# Altium PCB pcb mia.PcbDoc
Units mm, origin at the board's own origin, x right, y up, seen from the top; angles counter-clockwise.
Board outline 96.01 x 69.34 mm, 2 copper layers (Top Layer, Bottom Layer); 16 components, 12 nets, 36 pads, 0 vias.
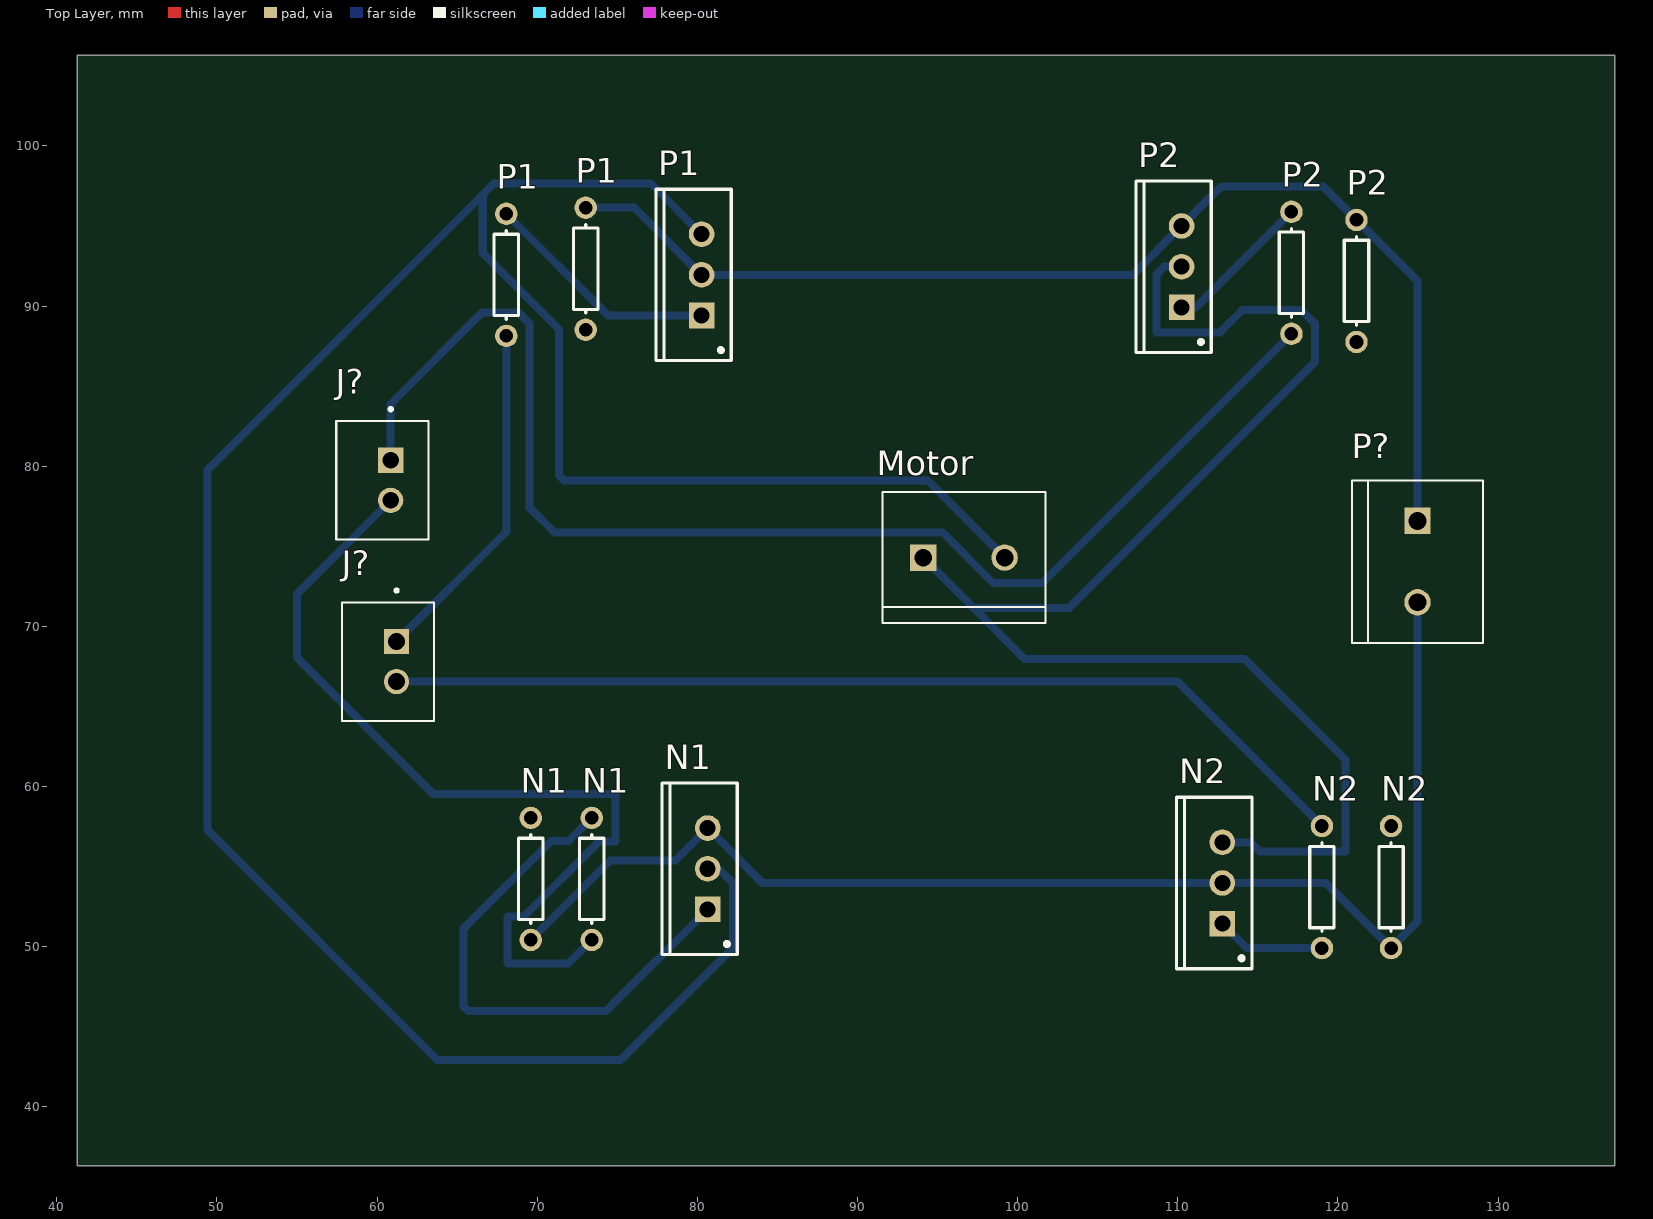
[diagram p0: Top Layer view]
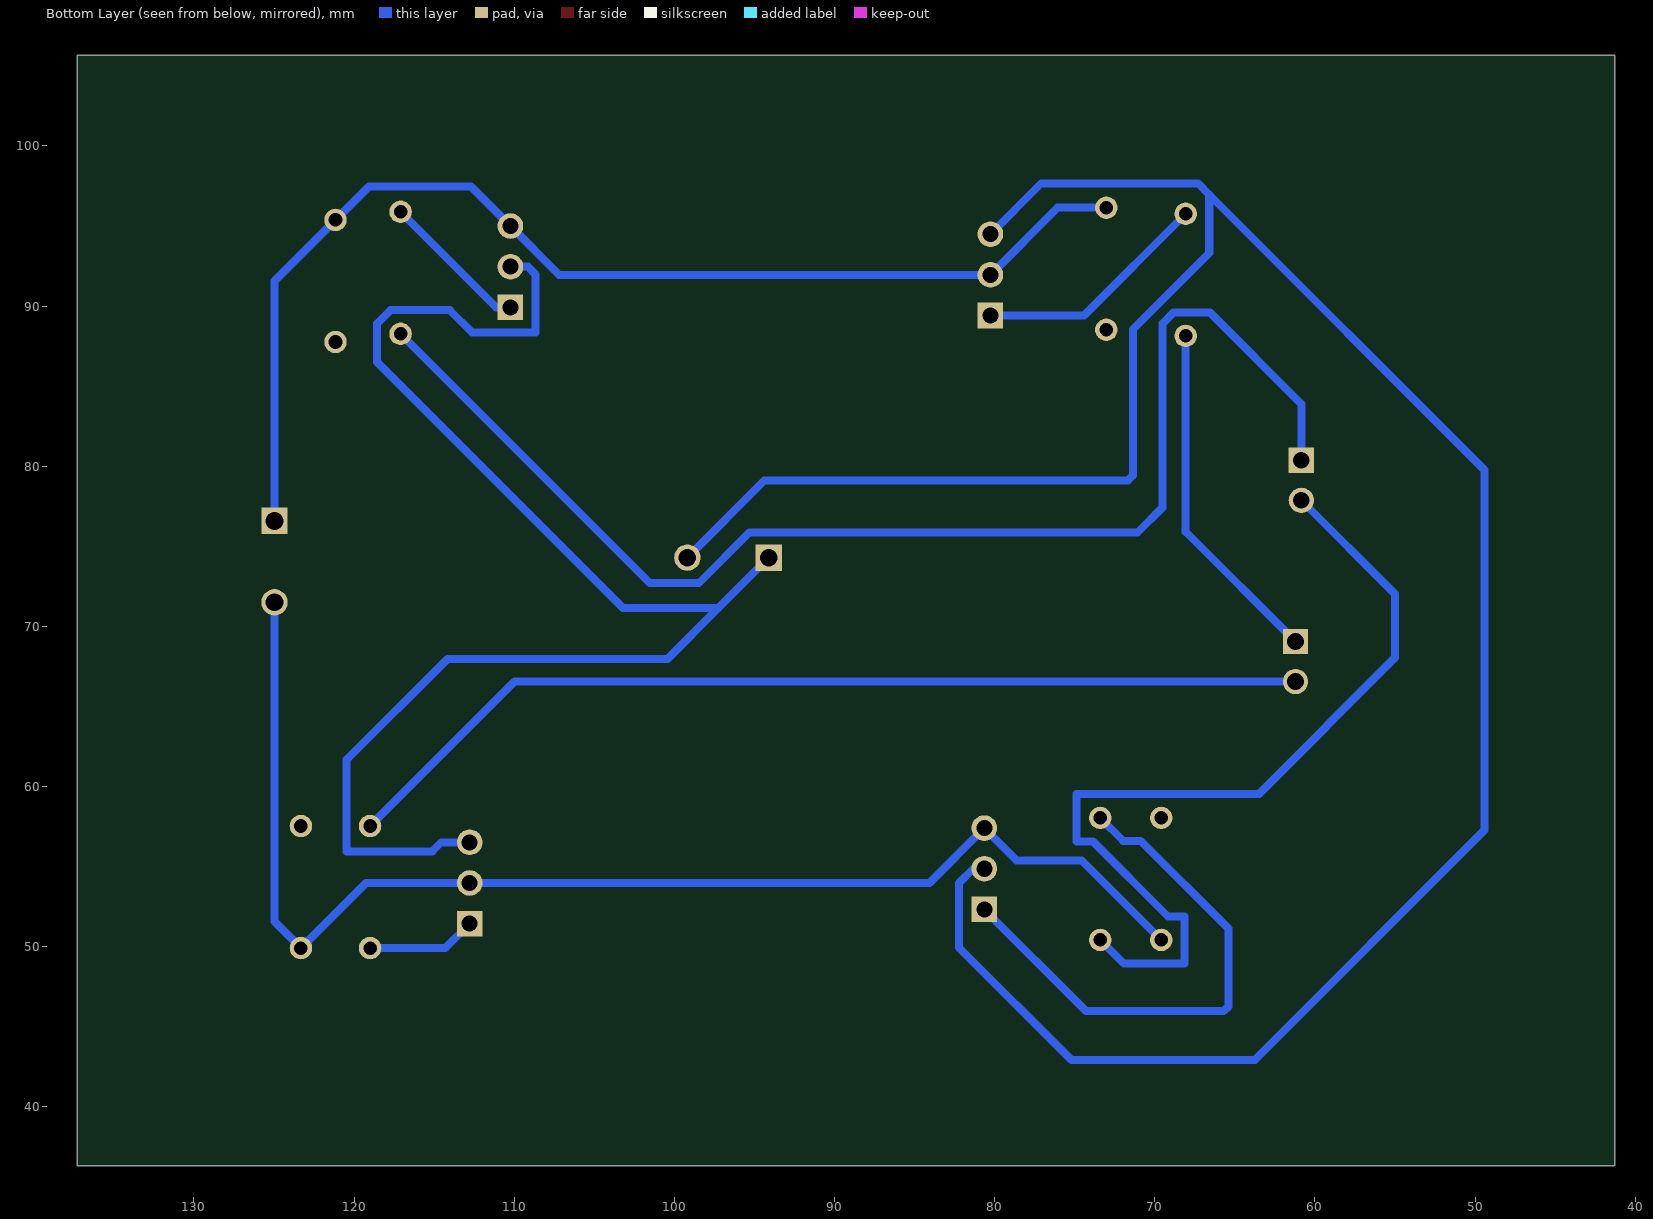
[diagram p1: Bottom Layer view, seen from below]

## Layer stack, top to bottom
Top Solder: solder mask 0.0102, Solder Resist, Dk 3.5
Top Layer: signal copper 0.0356
Dielectric 1: dielectric 0.32, FR-4, Dk 4.8
Bottom Layer: signal copper 0.0356
Bottom Solder: solder mask 0.0102, Solder Resist, Dk 3.5

## Board outline
41.275,36.322 137.287,36.322 137.287,105.664 41.275,105.664

## Design rules (kind name [scope] priority, off if disabled: settings)
Clearance [All] p1: gap=0.5 ignorepadtopadclearanceinfootprint=FALSE
PolygonConnect [All] p1: connectstyle=Relief reliefconductorwidth=0.254 reliefentries=4 polygonreliefangle="90 Angle" airgapwidth=0.254
RoutingLayers [All] p1: top layer_v5=FALSE bottom layer_v5=TRUE
RoutingVias [All] p1: holewidth=0.711 width=1.27 viastyle="Through Hole" minholewidth=0.711 minwidth=1.27 maxholewidth=0.711 maxwidth=1.27
SolderMaskExpansion [All] p1: expansion=0.102 istentingtop=FALSE
UnRoutedNet [All] p1: checkbadconnections=TRUE
Width [All] p1: maxlimit=1 minlimit=0.254 preferedwidth=0.5
28 further rules are at their usual default settings.

## Classes and differential pairs
component class mia: J? Motor N1 N2 P1 P2 P?

## Components (designator, comment, footprint, x,y, rotation, side; value= is the part's Value field where it differs from the comment)
J? "B2B-XH-A(LF)(SN)" JST_B2B-XH-A(LF)(SN) 60.325,79.121 r90 top
J? "B2B-XH-A(LF)(SN)" JST_B2B-XH-A(LF)(SN) 60.689,67.798 r90 top
Motor "282837-2" TE_282837-2 96.647,74.295 r0 top
N1 "NMOS-2" TO-220AB 80.645,54.864 r90 top
N1 "Res1" AXIAL-0.3 73.406,54.229 r90 top value=100
N1 "Res1" AXIAL-0.3 69.596,54.229 r90 top value=10K
N2 "Res1" AXIAL-0.3 123.317,53.721 r90 top value=10K
N2 "Res1" AXIAL-0.3 118.999,53.721 r90 top value=100
N2 "NMOS-2" TO-220AB 112.776,53.975 r90 top
P1 "Res1" AXIAL-0.3 68.072,91.948 r90 top value=100
P1 "PMOS-2" TO-220AB 80.264,91.948 r90 top
P1 "Res1" AXIAL-0.3 73.025,92.329 r90 top value=10K
P2 "Res1" AXIAL-0.3 117.094,92.075 r270 top value=100
P2 "Res1" AXIAL-0.3 121.158,91.567 r90 top value=10K
P2 "PMOS-2" TO-220AB 110.236,92.456 r90 top
P? "282837-2" TE_282837-2 124.968,74.041 r270 top

## Footprints (in the part's own frame and the unit in brackets; to place one, negate y for a bottom-side part, rotate by r counter-clockwise, add the part's x,y. Pads: shape width x height; smd on the part's side, far side on the other; paste and mask are expansions set on the pad)
AXIAL-0.3 [mm] "Axial Device, Thru-Hole; 2 Leads; 0.3 in Pin Spacing"
  round 1.4 hole 0.85: 1(-3.81,0) 2(3.81,0)
  silkscreen extent -2.77,-0.76 2.77,0.76
JST_B2B-XH-A(LF)(SN) [mm]
  rect 1.575x1.575 / inner round 1.575 / far side rect 1.575x1.575 hole 1.05: 1(1.25,-0.525)
  round 1.575 hole 1.05: 2(-1.25,-0.525)
  silkscreen extent -3.7,-2.88 4.54,2.87, body extent -3.7,-2.88 3.7,2.88, height 7
TE_282837-2 [mm]
  rect 1.65x1.65 / inner round 1.65 / far side rect 1.65x1.65 hole 1.1: 1(-2.54,0)
  round 1.65 hole 1.1: 2(2.54,0)
  silkscreen extent -5.08,-4.1 5.08,4.1, body extent -5.68,-4.1 5.08,4.1, height 10
TO-220AB [mm] "TO, Thru-Hole, Vertical, Heatsink Mounted; 3 In-Line Leads; Pitch 2.54 mm"
  rect 1.6x1.6 hole 1: 1(-2.54,0)
  round 1.6 hole 1: 2(0,0) 3(2.54,0)
  silkscreen extent -5.35,-1.85 5.35,2.85, body extent -5.4,-1.9 5.4,2.9, height 19.3

## Part data
J? J?: "Connector Header Through Hole 2 position 0.098 (2.50mm)", Package=None, Check_prices=https://www.snapeda.com/parts/B2B-XH-A(LF)(SN)/JST+Sales+America+Inc./view-part/?ref=eda, MF="JST Sales America Inc.", MP=B2B-XH-A(LF)(SN), SnapEDA_Link=https://www.snapeda.com/parts/B2B-XH-A(LF)(SN)/JST+Sales+America+Inc./view-part/?ref=snap
Motor P?: "Ð Ð°Ð·ÑŠÐµÐ¼Ð½Ñ‹Ðµ ÐºÐ»ÐµÐ¼Ð¼Ð½Ñ‹Ðµ ÐºÐ¾Ð»Ð¾Ð´ÐºÐ¸ Ð Ð¾Ð·ÐµÑ‚ÐºÐ° 2 Ð¿Ð¾Ð»Ð¾Ð¶ÐµÐ½Ð¸Ñ 5,08 Ð¼Ð¼ ÐŸÑ€Ð¸Ð¿Ð¾Ð¹ Ð¿Ñ€ÑÐ¼Ð¾Ð¹ Ñ‡ÐµÑ€ÐµÐ· Ð¾Ñ‚Ð²ÐµÑ€ÑÑ‚Ð¸Ðµ 13,5 Ð / ÐºÐ¾Ð½Ñ‚Ð°ÐºÑ‚", Package=None, Availability="In Stock", Check_prices=https://www.snapeda.com/parts/282837-2/TE+Connectivity+AMP+Connectors/view-part/?ref=eda, MF="TE Connectivity", MP=282837-2, Price=None, Purchase-URL=https://pricing.snapeda.com/search/part/282837-2/?ref=eda, SnapEDA_Link=https://www.snapeda.com/parts/282837-2/TE+Connectivity+AMP+Connectors/view-part/?ref=snap
N1 N2: "N-Channel Power MOSFET", ComponentLink1Description="Manufacturer Link", ComponentLink1URL=http://www.irf.com/, DatasheetVersion=PD-9.814, LatestRevisionDate=17-Jul-2002, LatestRevisionNote="Re-released for DXP Platform.", Note="Pin 2 is electrically connected to pin 4.", PackageDescription="TO, Thru-Hole, Vertical, Heatsink Mounted; 3 In-Line Leads; Pitch 2.54 mm", PackageReference=TO-220AB, PackageVersion=Feb-1997, Published=8-Jun-2000, Publisher="Altium Limited"
N1 N1 N2 N2 P1 P1 P2 P2: "Resistor", LatestRevisionDate=17-Jul-2002, LatestRevisionNote="Re-released for DXP Platform.", PackageDescription="Axial Device, Thru-Hole; 2 Leads; 0.3 in Pin Spacing", PackageReference=AXIAL-0.3, Published=8-Jun-2000, Publisher="Altium Limited"
P1 P2: "P-Channel Power MOSFET", ComponentLink1Description="Manufacturer Link", ComponentLink1URL=http://www.irf.com/, DatasheetVersion=PD-9.390D, LatestRevisionDate=17-Jul-2002, LatestRevisionNote="Re-released for DXP Platform.", Note="Pin 4 not drawn and electrically connected to Pin 2.", PackageDescription="TO, Thru-Hole, Vertical, Heatsink Mounted; 3 In-Line Leads; Pitch 2.54 mm", PackageReference=TO-220AB, PackageVersion=Feb-1997, Published=8-Jun-2000, Publisher="Altium Limited"

## Nets (pads, with @x,y where several pads share a name; then routed paths per layer and width w, separated by ;. In a path a pad name is that pad's centre, name@x,y a point inside that pad or via, vN(x,y) a via of type N, cw(c..) or ccw(c..) an arc to the next point about the centre after c; other vN are vias at no path point)
+12: P1.2@73.025,96.139 P1.2@80.264,91.948 P2.2@121.158,95.377 P2.3 P?.1 | length 73.4
  Bottom Layer w0.5: P1.2@73.025,96.139 76.073,96.139 80.264,91.948 107.188,91.948 P2.3 112.7,97.46 119.075,97.46 121.158,95.377 124.968,91.567 P?.1
GND: N1.1@69.596,50.419 N1.3 N2.1@123.317,49.911 N2.2@112.776,53.975 P?.2 | length 82
  Bottom Layer w0.5: N1.1@69.596,50.419 74.56,55.383 78.624,55.383 N1.3 84.074,53.975 112.776,53.975 119.253,53.975 123.317,49.911 124.968,51.562 P?.2
NetMotor_1: Motor.1 N2.3 P2.2@110.236,92.456 | length 91.5
  Bottom Layer w0.5: Motor.1 97.257,71.145 ; P2.2@110.236,92.456 109.144,92.456 108.661,91.973 108.661,88.341 112.624,88.341 114.021,89.738 117.729,89.738 118.567,88.9 118.567,86.512 103.2,71.145 97.257,71.145 ; N2.3 114.554,56.515 115.113,55.956 120.472,55.956 120.472,61.671 114.173,67.97 100.432,67.97 97.257,71.145
NetMotor_2: Motor.2 N1.2@80.645,54.864 P1.3 | length 159.2
  Bottom Layer w0.5: P1.3 77.089,97.663 67.31,97.663 66.599,96.952 ; N1.2@80.645,54.864 81.331,54.864 82.22,53.975 82.22,49.936 75.209,42.926 63.754,42.926 49.403,57.277 49.403,79.756 66.599,96.952 ; Motor.2 94.361,79.121 71.667,79.121 71.374,79.414 71.374,88.544 66.599,93.32 66.599,96.952
NetN1_1: N1.1@80.645,52.324 N1.2@73.406,58.039 | length 33.7
  Bottom Layer w0.5: N1.2@73.406,58.039 71.974,56.607 70.884,56.607 65.405,51.128 65.405,46.267 65.698,45.974 74.295,45.974 N1.1@80.645,52.324
NetN2_1: N2.1@112.776,51.435 N2.1@118.999,49.911 | length 6.9
  Bottom Layer w0.5: N2.1@112.776,51.435 114.3,49.911 N2.1@118.999,49.911
NetP1_1: P1.1@80.264,89.408 P1.2@68.072,95.758 | length 14.8
  Bottom Layer w0.5: P1.2@68.072,95.758 74.422,89.408 P1.1@80.264,89.408
NetP2_1: P2.1@110.236,89.916 P2.1@117.094,95.885 | length 9.3
  Bottom Layer w0.5: P2.1@110.236,89.916 111.125,89.916 P2.1@117.094,95.885
"Pin 1": J?.1@61.214,69.048 P1.1@68.072,88.138 | length 21.9
  Bottom Layer w0.5: J?.1@61.214,69.048 68.072,75.906 P1.1@68.072,88.138
"Pin 2": J?.2@61.214,66.548 N2.2@118.999,57.531 | length 61.5
  Bottom Layer w0.5: J?.2@61.214,66.548 109.982,66.548 N2.2@118.999,57.531
"Pin 3": J?.1@60.85,80.371 P2.2@117.094,88.265 | length 82.3
  Bottom Layer w0.5: J?.1@60.85,80.371 60.85,83.89 66.548,89.588 68.834,89.588 69.522,88.9 69.522,77.417 71.069,75.87 95.301,75.87 98.476,72.695 101.524,72.695 P2.2@117.094,88.265
"Pin 4": J?.2@60.85,77.871 N1.1@73.406,50.419 | length 56.1
  Bottom Layer w0.5: J?.2@60.85,77.871 54.991,72.012 54.991,68.047 63.5,59.538 74.879,59.538 74.879,56.566 73.863,56.566 69.164,51.867 68.146,51.867 68.146,48.946 71.933,48.946 N1.1@73.406,50.419
pads on no net: N1.2@69.596,58.039 N2.2@123.317,57.531 P1.1@73.025,88.519 P2.1@121.158,87.757